# EAGLE board CT_schematic (EAGLE 7.6.0)

Size 100 x 80 mm. Coordinates in mm from the lower left corner, seen from the top.
Outline: 0,0 100,0 100,80 0,80 0,0
Copper layers (1*16): Top 0.035mm / dielectric 1.5mm / Bottom 0.035mm
Design rules "default": minimum track width 10mil, minimum drill 24mil, track to track 8mil, track to pad 8mil, pad to pad 8mil, via to via 8mil, smd to smd 8mil, copper to edge 40mil, drill to drill 8mil, minimum pad ring 10mil, minimum via ring 8mil, stop-mask expansion 4mil, vias tented up to drill 0mil, thermal gap 10mil

## Footprints (pad centres in the part's own frame; a part is rotated, then mirrored left to right if it is on the bottom)
C0603 = smd 0.8 x 0.8: 1 -0.762,0; 2 0.762,0
C0402 = smd 0.5 x 0.5: 1 -0.508,0; 2 0.508,0
C1210 = smd 1.2 x 2.5: 1 -1.524,0; 2 1.524,0
EXV-9H = smd 3.505 x 1.676: 1 -2.857,0; 2 2.857,0
L0603 = smd 0.8 x 0.8: 1 -0.762,0; 2 0.762,0
PJ-037B_PACKAGE = drill 3.7 square: 1 12,0 | drill 3.2 square: 2 6,0
R0603 = smd 0.8 x 0.8: 1 -0.762,0; 2 0.762,0
TFBGA64 = smd 0.35 x 0.35: A1 -1.75,1.75; A2 -1.25,1.75; A3 -0.75,1.75; A4 -0.25,1.75; A5 0.25,1.75; A6 0.75,1.75; A7 1.25,1.75; A8 1.75,1.75; B1 -1.75,1.25; B2 -1.25,1.25; B3 -0.75,1.25; B4 -0.25,1.25; B5 0.25,1.25; B6 0.75,1.25; B7 1.25,1.25; B8 1.75,1.25; C1 -1.75,0.75; C2 -1.25,0.75; C3 -0.75,0.75; C4 -0.25,0.75; C5 0.25,0.75; C6 0.75,0.75; C7 1.25,0.75; C8 1.75,0.75; D1 -1.75,0.25; D2 -1.25,0.25; D3 -0.75,0.25; D4 -0.25,0.25; D5 0.25,0.25; D6 0.75,0.25; D7 1.25,0.25; D8 1.75,0.25; E1 -1.75,-0.25; E2 -1.25,-0.25; E3 -0.75,-0.25; E4 -0.25,-0.25; E5 0.25,-0.25; E6 0.75,-0.25; E7 1.25,-0.25; E8 1.75,-0.25; F1 -1.75,-0.75; F2 -1.25,-0.75; F3 -0.75,-0.75; F4 -0.25,-0.75; F5 0.25,-0.75; F6 0.75,-0.75; F7 1.25,-0.75; F8 1.75,-0.75; G1 -1.75,-1.25; G2 -1.25,-1.25; G3 -0.75,-1.25; G4 -0.25,-1.25; G5 0.25,-1.25; G6 0.75,-1.25; G7 1.25,-1.25; G8 1.75,-1.25; H1 -1.75,-1.75; H2 -1.25,-1.75; H3 -0.75,-1.75; H4 -0.25,-1.75; H5 0.25,-1.75; H6 0.75,-1.75; H7 1.25,-1.75; H8 1.75,-1.75
TSSOP20-I = smd 0.4 x 1.35: 1 -2.925,-2.875; 2 -2.275,-2.875; 3 -1.625,-2.875; 4 -0.975,-2.875; 5 -0.325,-2.875; 6 0.325,-2.875; 7 0.975,-2.875; 8 1.625,-2.875; 9 2.275,-2.875; 10 2.925,-2.875; 11 2.925,2.875; 12 2.275,2.875; 13 1.625,2.875; 14 0.975,2.875; 15 0.325,2.875; 16 -0.325,2.875; 17 -0.975,2.875; 18 -1.625,2.875; 19 -2.275,2.875; 20 -2.925,2.875
HTSS-105-01-G-D = drill 1 pad 1.8 square: 1 0,0 | drill 1 pad 1.8: 2 0,2.54; 3 2.54,0; 4 2.54,2.54; 5 5.08,0; 6 5.08,2.54; 7 7.62,0; 8 7.62,2.54; 9 10.16,0; 10 10.16,2.54
ABLS-25.000MHZ-B2F-T = smd 5.6 x 2.8: 1 -3.81,0; 2 5.69,0
ASEK = smd 1.4 x 1: 1 -1.1,-0.8; 2 1.1,-0.8; 3 1.1,0.8; 4 -1.1,0.8
SOIC-8_EP = smd 1.6 x 0.533: 1 -2.921,1.905; 2 -2.921,0.635; 3 -2.921,-0.635; 4 -2.921,-1.905; 5 2.921,-1.905; 6 2.921,-0.635; 7 2.921,0.635; 8 2.921,1.905 | smd 2.54 x 3.302: EPAD 0,0 | drill 0.406 pad 0.406: P$1 -0.508,0.635; P$2 0.381,0.635; P$3 -0.508,-0.635; P$4 0.381,-0.635
SON-6 = smd 0.55 x 0.3: 1 -0.355,0.5 | smd 0.52 x 0.3: 2 -0.37,0; 3 -0.37,-0.5; 4 0.37,-0.5; 5 0.37,0; 6 0.37,0.5
SW_4-1437565-2 = smd 1.4 x 2.1: 1 -2.23,4.55; 2 -2.23,-4.55; 3 2.23,4.55; 4 2.23,-4.55
LGM67K-G1J2-24-Z = smd 0.8 x 1.4: A -2,0; C 0,0
NC7SZ125M5X = smd 1.3 x 0.7: 1 -1.3,0.95; 2 -1.3,0; 3 -1.3,-0.95; 4 1.3,-0.95; 5 1.3,0.95
DUMMY_PACKAGE_101 = drill 0.3: 1 0,-1; 2 1.5,-1; 3 3,-1

## Placement (x,y rotation side)
C1  1e-07  [C0603]  -33.02,50.8 0 top  (outside the outline)
C2  1e-07  [C0603]  -36.83,50.8 0 top  (outside the outline)
C3  1e-07  [C0603]  -40.64,50.8 0 top  (outside the outline)
C4  1e-07  [C0603]  -44.45,50.8 0 top  (outside the outline)
C5  4.7e-06  [C0603]  -29.21,50.8 0 top  (outside the outline)
C6  1e-07  [C0603]  -48.26,50.8 0 top  (outside the outline)
C7  1e-08  [C0603]  -52.07,50.8 0 top  (outside the outline)
C8  1e-06  [C0603]  -55.88,50.8 0 top  (outside the outline)
C9  1e-11  [C0402]  -34.29,55.88 0 top  (outside the outline)
C10  1e-11  [C0402]  -38.1,55.88 0 top  (outside the outline)
C11  1e-07  [C0402]  -41.91,55.88 0 top  (outside the outline)
C12  1e-07  [C0402]  -45.72,55.88 0 top  (outside the outline)
C13  1e-07  [C0402]  -49.53,55.88 0 top  (outside the outline)
C14  1e-07  [C0402]  -53.34,55.88 0 top  (outside the outline)
C15  1e-07  [C0402]  -57.15,55.88 0 top  (outside the outline)
C16  1e-07  [C0402]  -60.96,55.88 0 top  (outside the outline)
C17  1e-08  [C0402]  -15.24,60.96 0 top  (outside the outline)
C18  1e-05  [C1210]  -58.42,38.1 0 top  (outside the outline)
C19  1e-05  [C1210]  -16.51,44.45 0 top  (outside the outline)
C20  1e-05  [C1210]  -22.86,44.45 0 top  (outside the outline)
C21  1e-05  [C1210]  -29.21,44.45 0 top  (outside the outline)
C22  1e-07  [C0402]  -19.05,60.96 0 top  (outside the outline)
C23  0.0001  [EXV-9H]  -38.1,30.48 0 top  (outside the outline)
C24  0.0001  [EXV-9H]  -49.53,30.48 0 top  (outside the outline)
C25  1e-08  [C0402]  -22.86,60.96 0 top  (outside the outline)
F1  240.0  [L0603]  -59.69,50.8 0 top  (outside the outline)
J1  PJ-037B  [PJ-037B_PACKAGE]  -27.94,7.62 0 top  (outside the outline)
R1  10000.0  [R0603]  -59.69,44.45 0 top  (outside the outline)
R2  1000.0  [R0603]  -15.24,55.88 0 top  (outside the outline)
R3  1600.5  [R0603]  -19.05,55.88 0 top  (outside the outline)
R4  4700.0  [R0603]  -22.86,55.88 0 top  (outside the outline)
R5  10000.0  [R0603]  -15.24,50.8 0 top  (outside the outline)
R6  4031.5447154472  [R0603]  -44.45,44.45 0 top  (outside the outline)
R7  2200.0  [R0603]  -26.67,55.88 0 top  (outside the outline)
R8  10000.0  [R0603]  -20.32,50.8 0 top  (outside the outline)
R9  10000.0  [R0603]  -25.4,50.8 0 top  (outside the outline)
R10  9100.0  [R0603]  -30.48,55.88 0 top  (outside the outline)
R11  680000.0  [R0603]  -49.53,44.45 0 top  (outside the outline)
R12  120000.0  [R0603]  -54.61,44.45 0 top  (outside the outline)
U1  STM32L051R6H6  [TFBGA64]  -58.42,19.05 0 top  (outside the outline)
U2  SP3203ECY-L/TR  [TSSOP20-I]  -24.13,20.32 0 top  (outside the outline)
U3  HTSS-105-01-G-D  [HTSS-105-01-G-D]  -43.18,19.05 0 top  (outside the outline)
U4  ABLS-25.000MHZ-B2F-T  [ABLS-25.000MHZ-B2F-T]  -26.67,38.1 0 top  (outside the outline)
U5  ASEK-32.768KHz-ECST  [ASEK]  -29.21,30.48 0 top  (outside the outline)
U6  MIC5234YME  [SOIC-8_EP]  -38.1,36.83 0 top  (outside the outline)
U7  TPS3895ADRYR  [SON-6]  -31.75,59.69 0 top  (outside the outline)
U8  4-1437565-2  [SW_4-1437565-2]  -44.45,6.35 0 top  (outside the outline)
U9  Q65110A2395  [LGM67K-G1J2-24-Z]  -46.99,38.1 0 top  (outside the outline)
U10  nc7sz125m5x  [NC7SZ125M5X]  -34.29,44.45 0 top  (outside the outline)
U11  Dummy  [DUMMY_PACKAGE_101]  -29.21,60.96 0 top  (outside the outline)

## Library data of the parts
C1-C25 F1 J1 R1-R12 U1-U11 = circuit_tree

## Nets
CLK_CRYSTAL_U1_C1: C9.1 U1.C1 U4.1
CLK_CRYSTAL_U1_D1: C10.1 U1.D1 U4.2
CLK_U1_A1: U1.A1 U5.3
GND: C1.2 C2.2 C3.2 C4.2 C5.2 C6.2 C7.2 C8.2 C9.2 C10.2 C11.2 C12.2 C15.2 C16.2 C17.2 C18.2 C19.2 C20.2 C21.2 C22.2 C23.2 C24.2 C25.2 J1.2 R2.2 R5.2 R7.2 R10.2 R12.2 U1.C2 U1.D4 U1.D5 U1.D6 U1.F1 U2.18 U3.9 U5.2 U6.7 U6.EPAD U7.2 U9.C U10.1 U10.3 U11.1
NET_U1_B4: R5.1 U1.B4
NET_U1_E1: R4.1 U1.E1 U10.4
NET_U1_H1: C7.1 C8.1 F1.1 U1.G1 U1.H1
NET_U1_H7: R3.1 U1.H7 U9.A
NET_U1_H8: R1.1 U1.H8 U8.3 U8.4
NET_U2_1: C13.1 U2.1
NET_U2_2: C15.1 U2.2
NET_U2_3: C13.2 U2.3
NET_U2_4: C14.1 U2.4
NET_U2_5: C14.2 U2.5
NET_U2_6: C16.1 U2.6
NET_U2_20: U2.20
NET_U3_3: U2.14 U3.3
NET_U3_4: U2.13 U3.4
NET_U3_5: U2.17 U3.5
NET_U3_6: U2.16 U3.6
NET_U6_4: R6.2 R7.1 U6.4
NET_U7_1: R9.1 R10.1 U7.1
NET_U7_3: R11.2 R12.1 U7.3
NET_U7_4: R8.1 U7.4 U10.2
NET_U8_1: R2.1 U8.1 U8.2
PROC_ADC_IN3: U1.G3 U11.2
PROC_ADC_IN4: U1.H3 U11.3
PROC_LPUART1_CTS: U1.G4 U2.8
PROC_LPUART1_RTS: U1.B5 U2.10
PROC_LPUART1_RX: U1.B6 U2.11
PROC_LPUART1_TX: U1.B7 U2.7
VCC_S1_12V2: C18.1 C19.1 C23.1 C24.1 J1.1 U6.5 U6.8
VCC_TIER1_3V3: C1.1 C2.1 C3.1 C4.1 C5.1 C6.1 C11.1 C12.1 C17.1 C20.1 C21.1 C22.1 C25.1 F1.2 R1.2 R3.2 R4.2 R6.1 R8.2 R9.2 R11.1 U1.B2 U1.D2 U1.E4 U1.E5 U1.E6 U2.12 U2.19 U5.4 U6.1 U7.6 U10.5

## Tracks (layer width: path | path; a pad name or v marks a point on that pad's centre or on a via)
CLK_CRYSTAL_U1_C1  (2 unrouted)
CLK_CRYSTAL_U1_D1  (2 unrouted)
CLK_U1_A1  (1 unrouted)
GND  (43 unrouted)
NET_U1_B4  (1 unrouted)
NET_U1_E1  (2 unrouted)
NET_U1_H1  (4 unrouted)
NET_U1_H7  (2 unrouted)
NET_U1_H8  (3 unrouted)
NET_U2_1  (1 unrouted)
NET_U2_2  (1 unrouted)
NET_U2_3  (1 unrouted)
NET_U2_4  (1 unrouted)
NET_U2_5  (1 unrouted)
NET_U2_6  (1 unrouted)
NET_U3_3  (1 unrouted)
NET_U3_4  (1 unrouted)
NET_U3_5  (1 unrouted)
NET_U3_6  (1 unrouted)
NET_U6_4  (2 unrouted)
NET_U7_1  (2 unrouted)
NET_U7_3  (2 unrouted)
NET_U7_4  (2 unrouted)
NET_U8_1  (2 unrouted)
PROC_ADC_IN3  (1 unrouted)
PROC_ADC_IN4  (1 unrouted)
PROC_LPUART1_CTS  (1 unrouted)
PROC_LPUART1_RTS  (1 unrouted)
PROC_LPUART1_RX  (1 unrouted)
PROC_LPUART1_TX  (1 unrouted)
VCC_S1_12V2  (6 unrouted)
VCC_TIER1_3V3  (31 unrouted)